# Altium PCB Pico_Main_Board.PcbDoc (part 2 of 2)
Units mil, origin at the board's own origin, x right, y up, seen from the top; angles counter-clockwise.
Board outline 4000 x 3000 mil, 2 copper layers (Top Layer, Bottom Layer); 20 components, 40 nets, 108 pads, 40 vias.
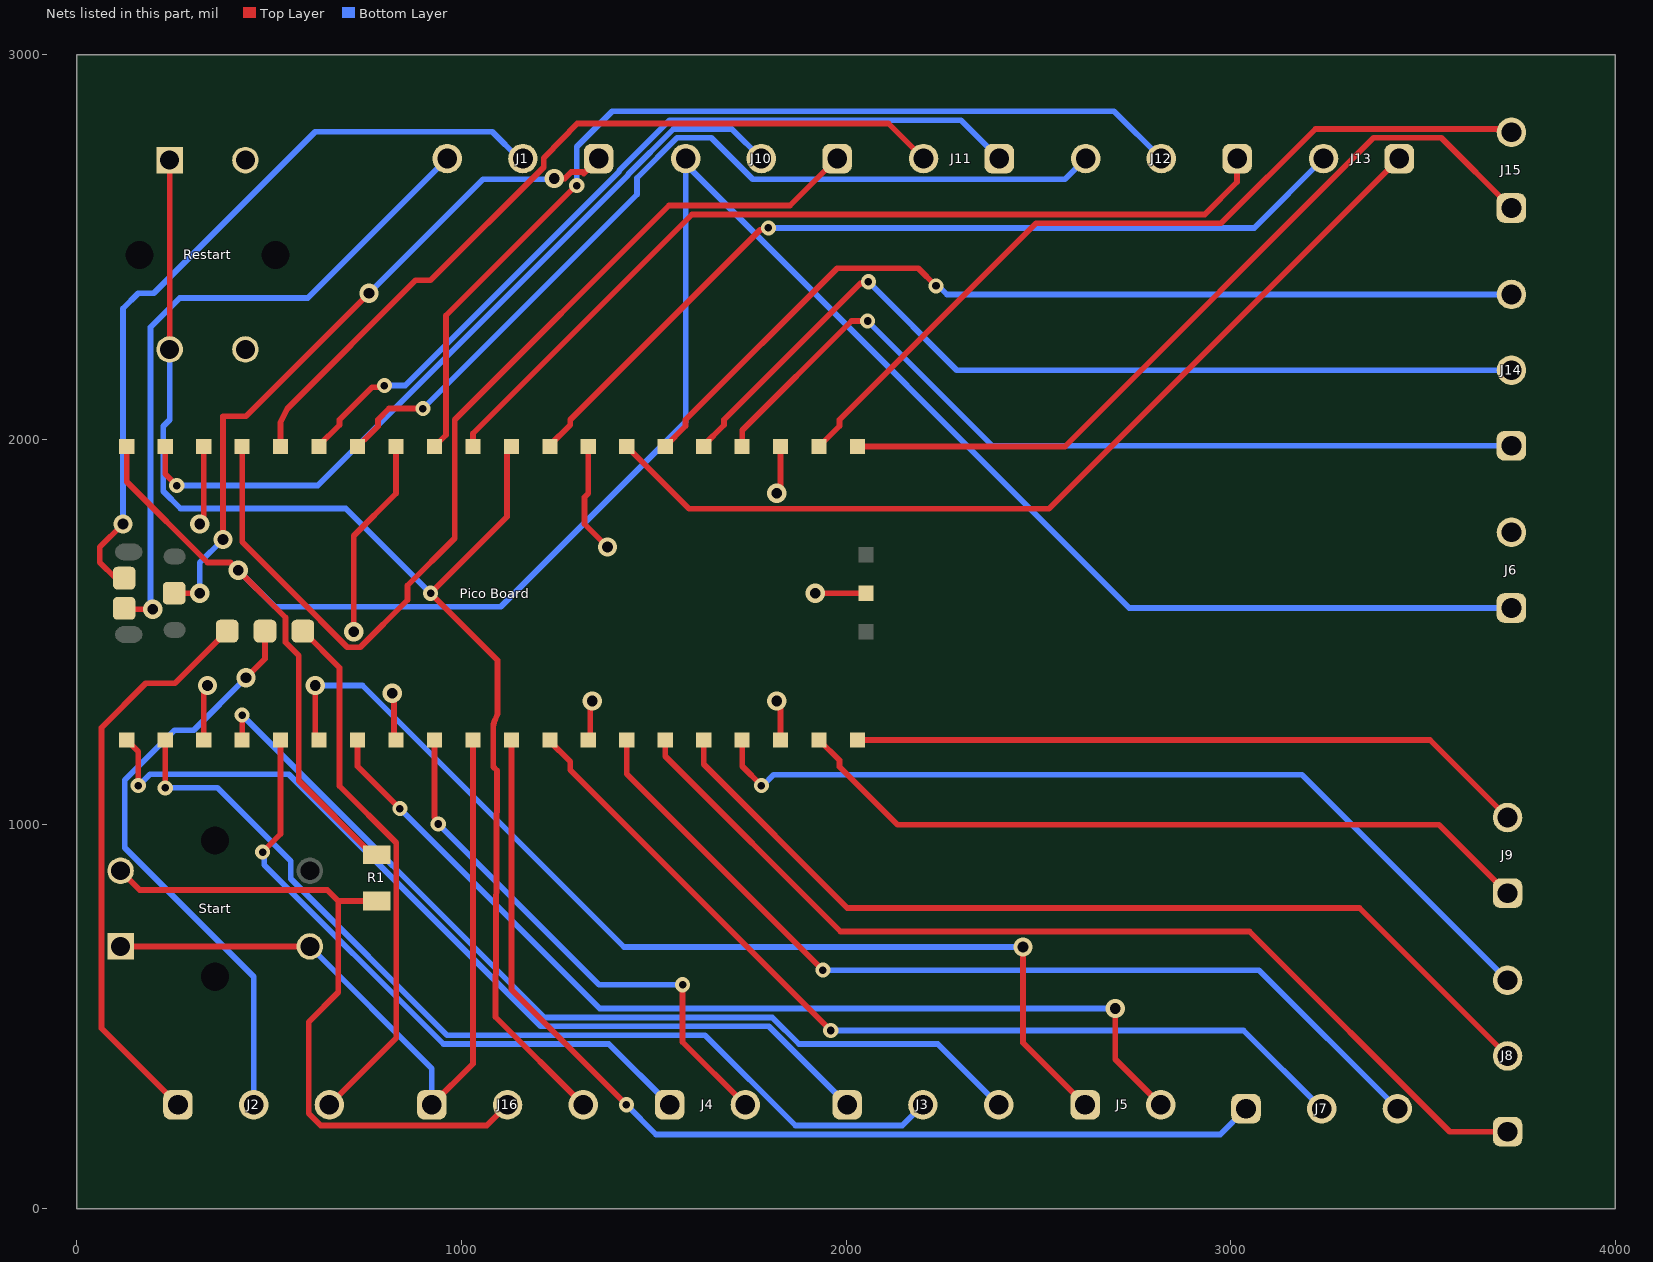
[diagram p2: the nets of this part, all layers, seen from the top]

## Part data
J1 J2 J3 J7 J8 J10 J12 J14 J16: library part CMP-1502-03325-2, Lead Pitch=5mm, NexarPartId=78871138, Number of Pins=3, Packaging=Box, RoHS=Non-Compliant
J4 J5 J6 J9 J11 J13 J15: library part CMP-1502-03324-2, Current Rating=16A, Max Operating Temperature=120°C, Min Operating Temperature=-30°C, Voltage Rating=300V, Contact Material="Nickel, Tin", Height=11.6mm, Lead Pitch=5mm, NexarPartId=78871135, Number of Contacts=2, Number of Pins=2, Number of Rows=1, Packaging=Box, RoHS=Non-Compliant
"Pico Board": "RP2040 Raspberry Pi Pico series ARMÂ® CortexÂ®-M0+ MCU 32-Bit Embedded Evaluation Board", Package=None, Availability="In Stock", Check_prices=https://www.snapeda.com/parts/SC0915/Raspberry+Pi/view-part/?ref=eda, MF="Raspberry Pi", MP=SC0915, Price=None, Purchase-URL=https://pricing.snapeda.com/search/part/SC0915/?ref=eda, SnapEDA_Link=https://www.snapeda.com/parts/SC0915/Raspberry+Pi/view-part/?ref=snap
R1: library part CMP-1014-00623-2, "Chip Resistor, 10 KOhm, +/- 1%, 0.25 W, -55 to 155 degC, 1206 (3216 Metric), RoHS, Tape and Reel", Case Code (Imperial)=1206, Case Code (Metric)=3216, Manufacturer=Yageo, Max Operating Temperature=155degC, Min Operating Temperature=-55degC, Package Description="2-Pin Surface Mount Device, Body 3.1 x 1.6 mm", Package Quantity=5000, Package Reference=1206.0, Power Rating=250mW, Resistance=10KOhm, Temperature Coefficient=100ppm/degreesC, Tolerance=1%, Voltage Rating=200V, Case/Package=1206, Composition=ThickFilm, Datasheet URL=http://www.yageo.com/NewPortal/yageodocoutput?fileName=/pdf/R-Chip/PYu-RC_Group_51_RoHS_L_5.pdf, Datasheet Version="Rev. 5, 10/2016", Depth=1.6mm, Height=0.55mm, Lead Free=LeadFree, Length=3.1mm, Manufacturer URL=http://www.yageo.com/, Military Standard=Not, Packaging=TapeandReel, REACH SVHC=Unknown, RoHSCompliant=true, Termination=SMD/SMT, Width=1.6mm
Restart Start: library part CMP-2000-05902-1, "Tactile Switch, 1 to 50 mA, 100 mOhm Max, 5 to 24 VDC, -25 to 70 degC, 4-Pin THD, RoHS, Bulk", Actuator Color=Orange, Contact Rating @ Voltage=0.05@24VDCA, Dielectric Strength=500VAC, Manufacturer=OmronElectronics, Maximum AC Voltage Rating=N/A, Maximum Contact Resistance=100mOhm, Maximum DC Voltage Rating=24V, Minimum Insulation Resistance=100MOhm, Operating Force=2.55N, Operating Temperature=-25to70C, Package Description="4-Pin Through Hole Device, Body 12 x 12 mm", Actuator Length=3mm, Actuator Style=ProjectedPlunger, Base Material=N/A, Body Orientation=Straight, Contact Material=N/A, Contact Plating=Gold, Datasheet URL=https://datasheet.ciiva.com/20148/78-0136-20148640.pdf, Datasheet Version=06/2009, Dimension=12x12x7.3mm, Electrical Life=1000000Cycles, Family=B3F, Ground Terminal=No, Housing Material=N/A, Illumination Type=N/R, Manufacturer URL=http://www.omron.com/, Mechanical Life=N/A, Mounting=ThroughHole,PCPins, Mounting Technology=ThroughHole, Package Reference=B3F-4055, Packaging=Bag, Part No=B3F-4055, Pole Throw Configuration=SPST, Product Weight=0.85g, RoHS=Yes, Seal Description=N/A, Seal Location=N/A, Switch Configuration=N.O., Type=Miniature

## Via types
v1: diameter 50, hole 28, Top Layer to Bottom Layer, 20 vias
v2: diameter 39.37, hole 19.68, Top Layer to Bottom Layer, 20 vias

## Nets (pads, with @x,y where several pads share a name; then routed paths per layer and width w, separated by ;. In a path a pad name is that pad's centre, name@x,y a point inside that pad or via, vN(x,y) a via of type N, cw(c..) or ccw(c..) an arc to the next point about the centre after c; other vN are vias at no path point)
3v3: "Pico Board.36" J11.2 | length 2115.8
  Top Layer w15: 530,1981.5 530,2043.79 547.17,2079.69 881.01,2413.53 919.58,2413.53 1213.89,2707.84 1213.89,2724.83 1213.89,2730.9 1218.1,2735.26 1301.26,2821.26 2110.47,2821.26 J11.2@2201.57,2730.16
AVREF: "Pico Board.35" J11.1 | length 2172.3
  Top Layer w15: 630,1981.5 630,1984.68 683,2037.69 683,2050.91 767.43,2135.34 795.34,2135.34 v2(800,2140)
  Bottom Layer w15: v2(800,2140) 854.14,2140 1410.74,2696.59 1410.74,2699 1541.78,2830.04 2298.54,2830.04 J11.1@2398.43,2730.16
EN: "Pico Board.37" J10.1 | length 2637.3
  Top Layer w15: 430,1981.5 430,1733.5 632.9,1530.6 632.9,1529.82 703.22,1459.5 736.78,1459.5 859.89,1582.61 859.89,1619.89 983,1743 983,2050.91 1540.03,2607.93 1854.63,2607.93 J10.1@1976.85,2730.16
flag_1: "Pico Board.11" J7.1 | length 2743
  Top Layer w15: 1130,1218.5 1130,569 v2(1429,270)
  Bottom Layer w15: v2(1429,270) 1506.04,192.96 2972.96,192.96 J7.1@3040,260
flag_2: "Pico Board.12" J7.2 | length 2418.4
  Top Layer w15: 1230,1218.5 1230,1215.32 1283,1162.31 1283,1140.63 v2(1960.5,463.13)
  Bottom Layer w15: v2(1960.5,463.13) 3033.72,463.13 J7.2@3236.85,260
flag_3: "Pico Board.14" J7.3 | length 2452.6
  Top Layer w15: 1430,1218.5 1430,1130 v2(1940,620)
  Bottom Layer w15: v2(1940,620) 3073.7,620 J7.3@3433.7,260
flag_4: "Pico Board.15" J8.1 | length 2636.6
  Top Layer w15: 1530,1218.5 1530,1176.32 1985.82,720.5 3049.41,720.5 3569.91,200 J8.1@3720,200
flag_5: "Pico Board.16" J8.2 | length 2467.4
  Top Layer w15: 1630,1218.5 1630,1155.19 2003.26,781.93 3334.92,781.93 J8.2@3720,396.85
flag_6: "Pico Board.17" J8.3 | length 2312
  Top Layer w15: 1730,1218.5 1730,1150 v2(1780,1100)
  Bottom Layer w15: v2(1780,1100) 1784.01,1100 1811.83,1127.83 3185.87,1127.83 J8.3@3720,593.7
flag_7: "Pico Board.19" J9.1 | length 1964.7
  Top Layer w15: 1930,1218.5 1983,1165.5 1983,1149.09 2134.13,997.96 3542.04,997.96 J9.1@3720,820
flag_8: "Pico Board.20" J9.2 | length 1773.5
  Top Layer w15: 2030,1218.5 3518.35,1218.5 J9.2@3720,1016.85
GND: "Pico Board.3" "Pico Board.8" "Pico Board.13" "Pico Board.18" "Pico Board.23" "Pico Board.28" "Pico Board.33" "Pico Board.38" "Pico Board.D2" J6.2 Restart.3 Restart.4 | length 1763.8
  Top Layer w15: v1(320,1780) 320,1789.47 330,1799.47 330,1981.5 ; 330,1218.5 330,1340.53 340,1350.53 v1(340,1360) ; v1(720,1500) 720,1749.47 830,1859.47 830,1981.5 ; v1(820,1340) 825,1335 825,1223.5 830,1218.5 ; 1330,1218.5 1335,1223.5 1335,1315 v1(1340,1320) ; 1330,1981.5 1330,1859.47 1320,1849.47 1320,1780 v1(1380,1720) ; v1(1820,1320) 1820,1310.53 1830,1300.53 1830,1218.5 ; v1(1820,1860) 1820,1869.47 1830,1879.47 1830,1981.5 ; v1(1920,1600) 2052.44,1600
key_column_1: "Pico Board.1" J3.1 | length 2342.1
  Top Layer w15: 130,1218.5 160,1188.5 v2(160,1100)
  Bottom Layer w15: v2(160,1100) 161.29,1100 190.47,1129.19 551.29,1129.19 1206.47,474 1798.99,474 J3.1@2003.15,269.84
key_column_2: "Pico Board.2" J3.2 | length 2507.4
  Top Layer w15: v2(230,1094) 230,1218.5
  Bottom Layer w15: v2(230,1094) 365.76,1094 556.11,903.65 556.11,857.74 962.85,451 1633.47,451 1868.52,215.96 2146.11,215.96 J3.2@2200,269.84
key_column_3: "Pico Board.4" J3.3 | length 2451
  Top Layer w15: 430,1218.5 v2(430,1283)
  Bottom Layer w15: v2(430,1283) 1216,497 1808.52,497 1877.58,427.94 2238.75,427.94 J3.3@2396.85,269.84
key_column_4: "Pico Board.5" J4.1 | length 1658.5
  Top Layer w15: v2(483,927) 530,974 530,1218.5
  Bottom Layer w15: v2(483,927) 487.66,922.34 487.66,893.66 953.32,428 1383.42,428 J4.1@1541.57,269.84
key_column_5: "Pico Board.9" J4.2 | length 1410.6
  Top Layer w15: 930,1218.5 930,1016.59 940,1006.59 v2(940,1000) ; v2(1575,582) 1575,433.27 J4.2@1738.43,269.84
  Bottom Layer w15: v2(940,1000) 1358,582 v2(1575,582)
kill_row_1: "Pico Board.34" J12.3 | length 2327.7
  Top Layer w15: 730,1981.5 763.4,2014.89 763.72,2014.89 783,2034.18 783,2050.91 812.1,2080 v2(900,2080)
  Bottom Layer w15: v2(900,2080) 1456.74,2636.74 1456.74,2679.95 1560.83,2784.04 1649.91,2784.04 1757.68,2676.27 2569.26,2676.27 J12.3@2623.15,2730.16
kill_row_2: "Pico Board.31" J12.1 | length 2352.4
  Top Layer w15: 1030,1981.5 1030,2015.32 1599.61,2584.93 2932.51,2584.93 3016.85,2669.27 J12.1@3016.85,2730.16
kill_row_3: "Pico Board.27" J13.1 | length 2452.7
  Top Layer w15: 1430,1981.5 1592,1819.5 2527.77,1819.5 J13.1@3438.43,2730.16
kill_row_4: "Pico Board.25" J14.2 | length 2382.3
  Top Layer w15: 1630,1981.5 1630,1984.68 1683,2037.69 1683,2050.91 2037.18,2405.09 2053.59,2405.09 v2(2058.25,2409.75)
  Bottom Layer w15: v2(2058.25,2409.75) 2288,2180 J14.2@3730.16,2180
kill_row_5: "Pico Board.22" J15.2 | length 2155.3
  Top Layer w15: 1930,1981.5 1983,2034.5 1983,2050.91 2494.03,2561.93 2975.27,2561.93 3220.38,2807.04 3721.54,2807.04 J15.2@3730.16,2798.43
move_row_1: "Pico Board.32" J12.2 | length 2542.8
  Top Layer w15: 930,1981.5 960,2011.5 960,2322 1298,2660 v2(1300,2660)
  Bottom Layer w15: v2(1300,2660) 1300,2760.76 1392.29,2853.04 2697.11,2853.04 J12.2@2820,2730.16
move_row_2: "Pico Board.29" J13.2 | length 2331.3
  Top Layer w15: 1230,1981.5 1230,1984.68 1283,2037.69 1283,2050.91 1777.18,2545.09 1793.59,2545.09 v2(1798.25,2549.75)
  Bottom Layer w15: v2(1798.25,2549.75) 3061.16,2549.75 J13.2@3241.57,2730.16
move_row_3: "Pico Board.26" J14.3 | length 2429.9
  Top Layer w15: 1530,1981.5 1583,2034.5 1583,2050.91 1977.03,2444.93 2187.98,2444.93 v2(2233.92,2399)
  Bottom Layer w15: v2(2233.92,2399) 2240.51,2399 2262.66,2376.85 J14.3@3730.16,2376.85
move_row_4: "Pico Board.24" J14.1 | length 2294.5
  Top Layer w15: 1730,1981.5 1730,2023.68 2014.07,2307.75 v2(2056.25,2307.75)
  Bottom Layer w15: v2(2056.25,2307.75) 2380.85,1983.15 J14.1@3730.16,1983.15
move_row_5: "Pico Board.21" J15.1 | length 2108.2
  Top Layer w15: 2030,1981.5 2569.12,1981.5 3371.67,2784.04 3547.69,2784.04 J15.1@3730.16,2601.57
NetJ16_2: J16.2 R1.2 Start.3 | length 1835.3
  Top Layer w15: Start.3@113.94,878.43 163.88,828.48 651.48,828.48 680,799.96 ; R1.2@780,799.96 680,799.96 ; J16.2@1120,269.84 1066.11,215.96 634.53,215.96 602.96,247.52 602.96,485.22 680,562.26 680,799.96
restart_button: "Pico Board.30" J16.3 Restart.1 Restart.2 | length 3644.3
  Top Layer w15: Restart.2@241.57,2233.94 Restart.1@241.57,2726.06 ; 1083.19,1258.18 1083,1256.42 1083,1149.09 1092.93,1139.16 1092.93,1132.84 1088.39,504.63 1088.39,498.3 J16.3@1316.85,269.84 ; 1083.2,1258.23 1084.3,1262.25 1084.57,1263.09 1085.54,1266.04 1086.98,1269.53 1087.22,1270.11 1094.02,1285.98 1094.02,1425.98 v2(920,1600) 1118.8,1798.8 1118.8,1970.3 1130,1981.5
  Bottom Layer w15: Restart.2@241.57,2233.94 241.57,2050.77 224.81,2034.01 224.81,1865.43 269.74,1820.5 699.5,1820.5 v2(920,1600)
SCL: "Pico Board.7" J5.2 | length 2598.7
  Top Layer w15: 730,1218.5 730,1150 v2(840,1040) ; v1(2700,520) 2700,388.27 J5.2@2818.43,269.84
  Bottom Layer w15: v2(840,1040) 1360,520 v1(2700,520)
SDA: "Pico Board.6" J5.1 | length 2744.4
  Top Layer w15: v1(620,1360) 620.3,1359.7 620.3,1228.21 630,1218.5 ; v1(2460,680) 2460,431.42 J5.1@2621.57,269.84
  Bottom Layer w15: v1(620,1360) 742.72,1360 1422.72,680 v1(2460,680)
start_button: "Pico Board.10" J16.1 Start.1 Start.2 | length 2028.1
  Top Layer w15: Start.1@113.94,681.57 Start.2@606.06,681.57 ; J16.1@923.15,269.84 1030,376.69 1030,1218.5
  Bottom Layer w15: Start.2@606.06,681.57 923.15,364.49 J16.1@923.15,269.84
TP1: "Pico Board.TP1" J1.1 | length 1809.1
  Top Layer w15: 253.23,1600 v1(320,1600) ; v1(380,1740) 380,2060 440,2060 v1(760,2380) ; v1(1241.66,2678.34) 1268.58,2678.34 1285.43,2695.19 1314.57,2695.19 1318.23,2691.53 J1.1@1356.85,2730.16
  Bottom Layer w15: v1(320,1600) 320,1680 v1(380,1740) ; v1(760,2380) 1056.27,2676.27 1239.6,2676.27 v1(1241.66,2678.34)
TP2: "Pico Board.TP2" J1.2 | length 2034.3
  Top Layer w15: v1(120,1780) 60,1720 60,1680 100.63,1639.37 123.31,1639.37 ; J1.2@1160,2730.16 J1.2@1160,2740
  Bottom Layer w15: v1(120,1780) 120,2340 160,2380 200,2380 620,2800 1080,2800 1149.84,2730.16 J1.2@1160,2730.16
TP3: "Pico Board.TP3" J1.3 | length 1777.8
  Top Layer w15: 123.31,1560.63 125.47,1558.47 v1(197.55,1558.47) ; J1.3@953.31,2740 J1.3@963.15,2730.16
  Bottom Layer w15: v1(197.55,1558.47) 191.63,1564.39 191.63,2291.63 267.83,2367.83 600.82,2367.83 J1.3@963.15,2730.16
TP4: "Pico Board.TP4" J2.1 | length 1494.2
  Top Layer w15: J2.1@263.15,269.84 63.99,469 63.99,1250.47 179.27,1365.76 255.21,1365.76 391.02,1501.57
TP5: "Pico Board.TP5" J2.2 | length 1550.8
  Top Layer w15: v1(440,1380) 489.45,1429.45 489.45,1501.57
  Bottom Layer w15: v1(440,1380) 303.94,1243.94 254.18,1243.94 124.81,1114.57 124.81,938.19 460,603 J2.2@460,269.84
TP6: "Pico Board.TP6" J2.3 | length 1404.5
  Top Layer w15: 587.87,1501.57 683,1406.44 683,1099 830.93,951.07 830.93,443.93 J2.3@656.85,269.84
VCC: "Pico Board.40" J6.1 J10.3 R1.1 | length 6083.1
  Top Layer w15: 130,1981.5 130,1890 340,1680 400,1680 v1(420,1660) 542.85,1537.15 542.85,1472.54 577,1438.4 577,1112.22 769.17,920.04 R1.1@780,920.04
  Bottom Layer w15: v1(420,1660) 515.19,1564.81 1102.09,1564.81 1583.15,2045.87 J10.3@1583.15,2715.09 ; J10.3@1583.15,2730.16 J10.3@1583.15,2715.09 ; J6.1@3730.16,1561.57 2736.67,1561.57 J10.3@1583.15,2715.09
VSYS: "Pico Board.39" J10.2 | length 2051.2
  Top Layer w15: 230,1981.5 230,1910 v2(260,1880)
  Bottom Layer w15: v2(260,1880) 626.67,1880 1433.74,2687.07 1433.74,2689.48 1551.3,2807.04 1703.11,2807.04 J10.2@1780,2730.16
pads on no net: "Pico Board.A" "Pico Board.B" "Pico Board.C" "Pico Board.D1" "Pico Board.D3" "Pico Board.D" Restart.MH1 Restart.MH2 Start.4 Start.MH1 Start.MH2

## Polygon pours and split planes (outlines as drawn)
GND on Bottom Layer "GND_L02_P000" (solid, remove dead copper, pour order 0): 0,3000 4000,3000 4000,0 0,0

## Keep-outs
Keep-Out Layer:
  the board outline again, w10